# Altium PCB RC motor driver.PcbDoc
Units mil, origin at the board's own origin, x right, y up, seen from the top; angles counter-clockwise.
Board outline 2024 x 1999 mil, 2 copper layers (Top Layer, Bottom Layer); 66 components, 40 nets, 212 pads, 36 vias.
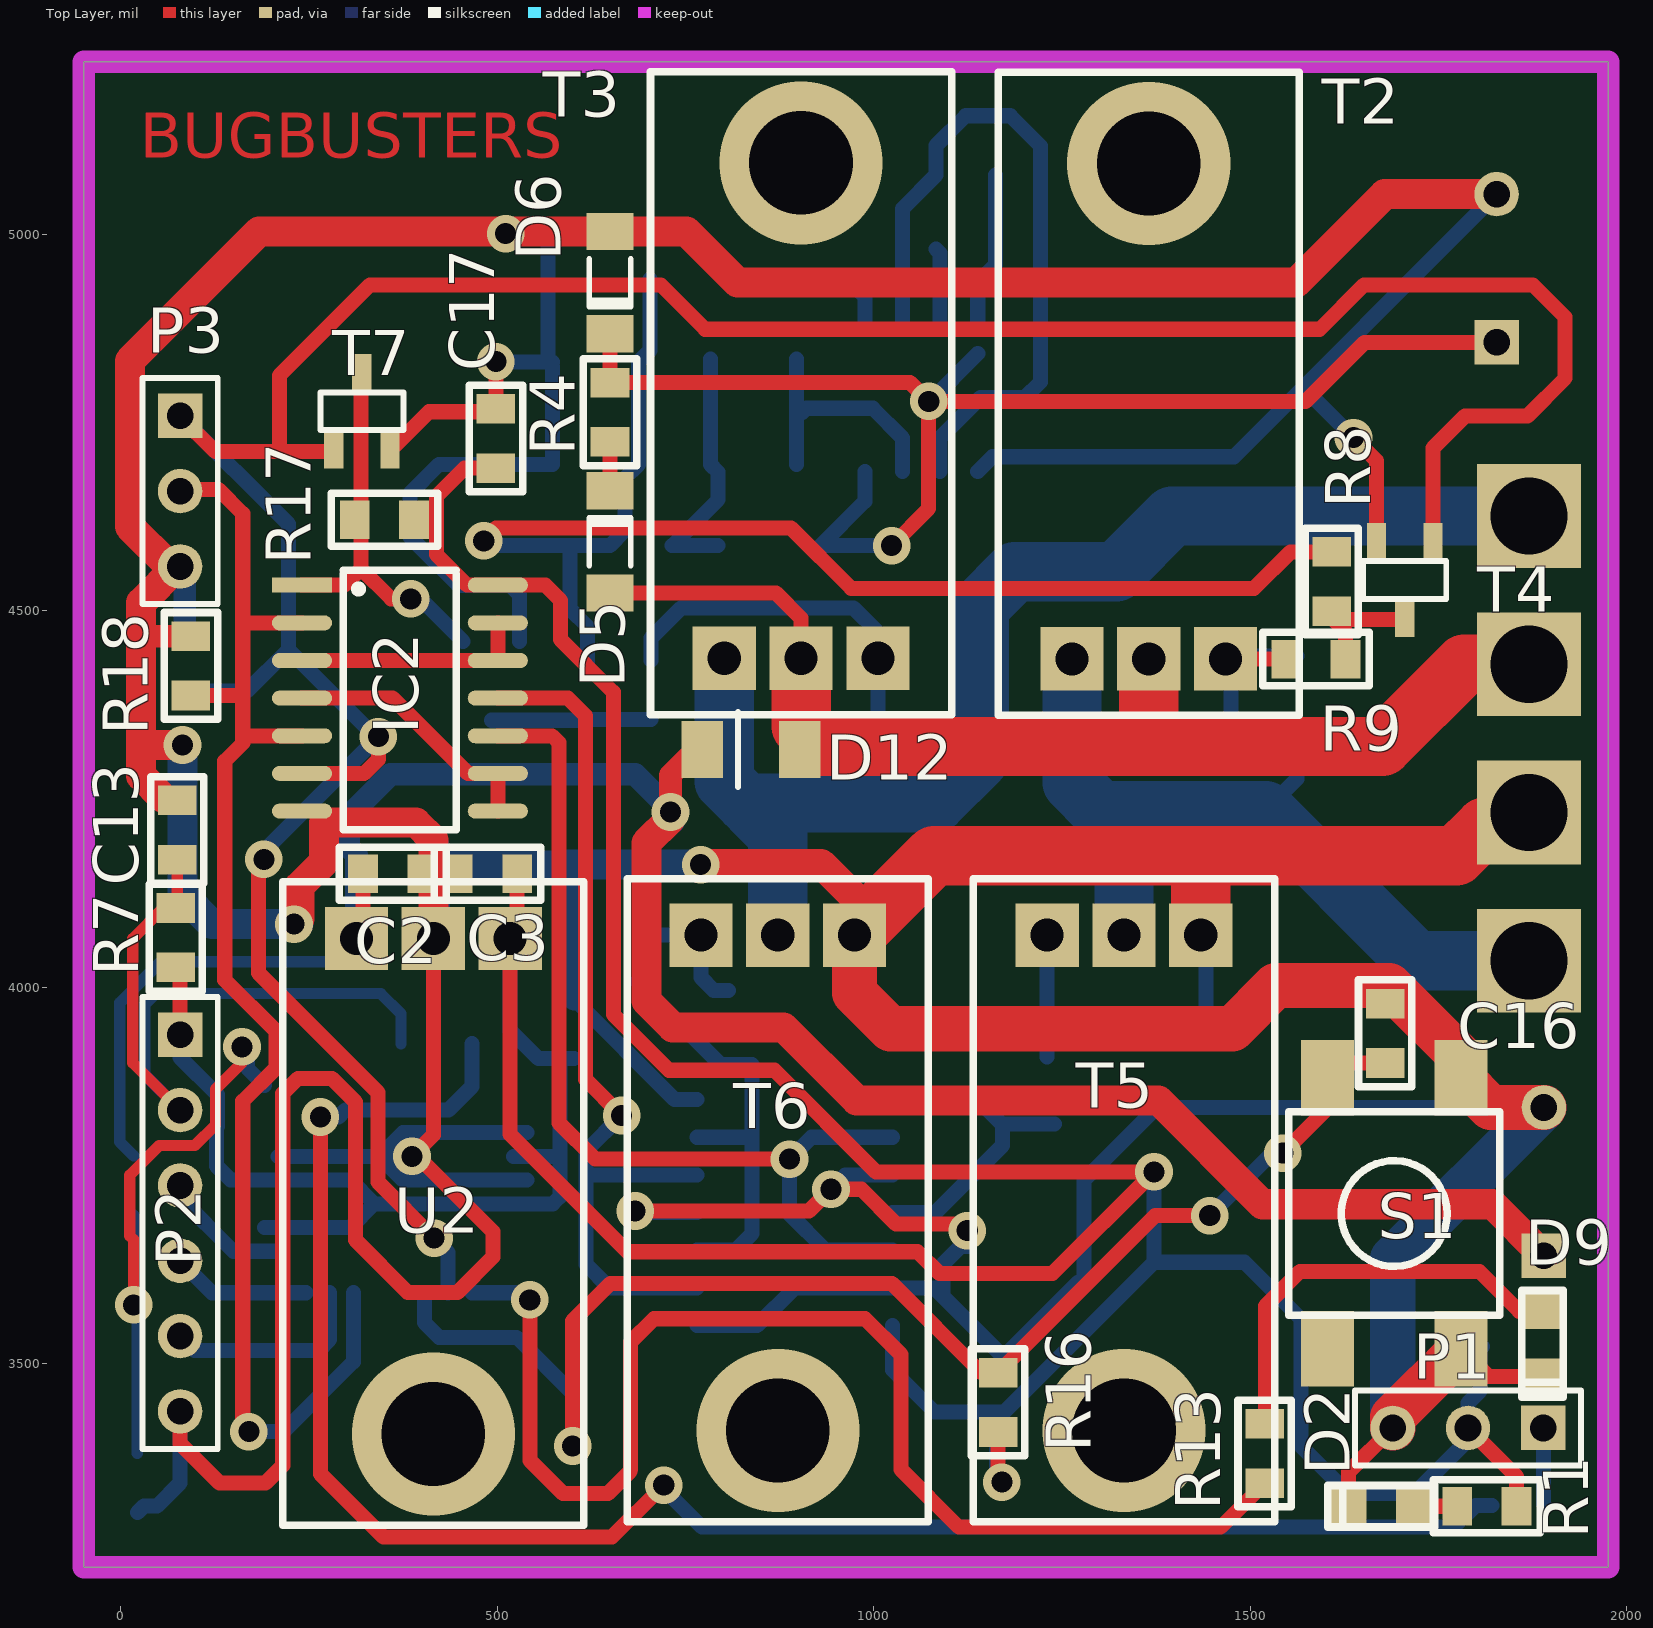
[diagram p0: Top Layer view]
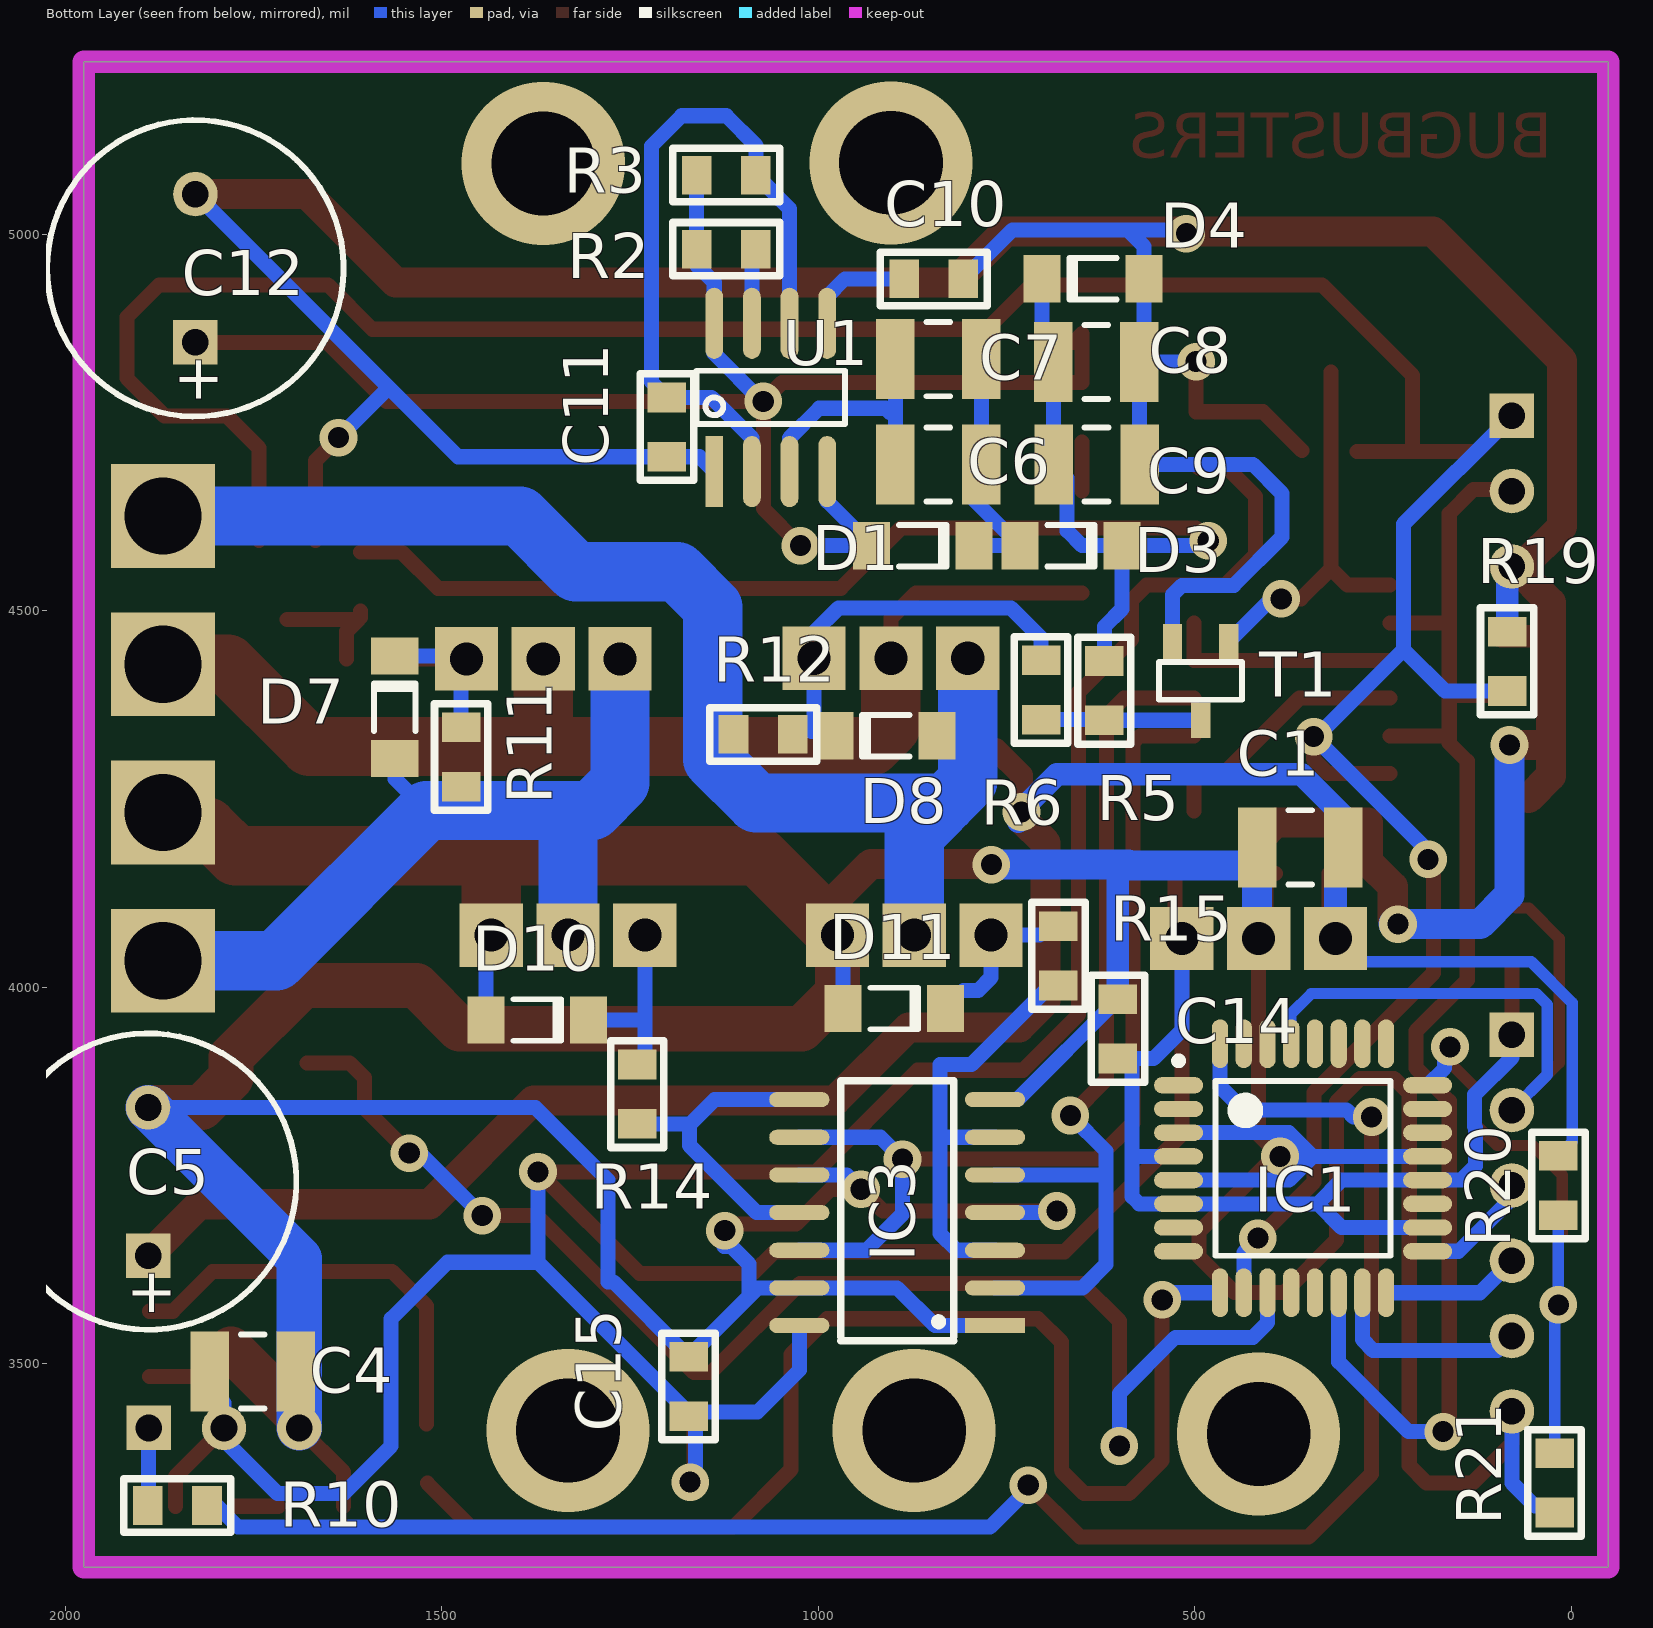
[diagram p1: Bottom Layer view, seen from below]
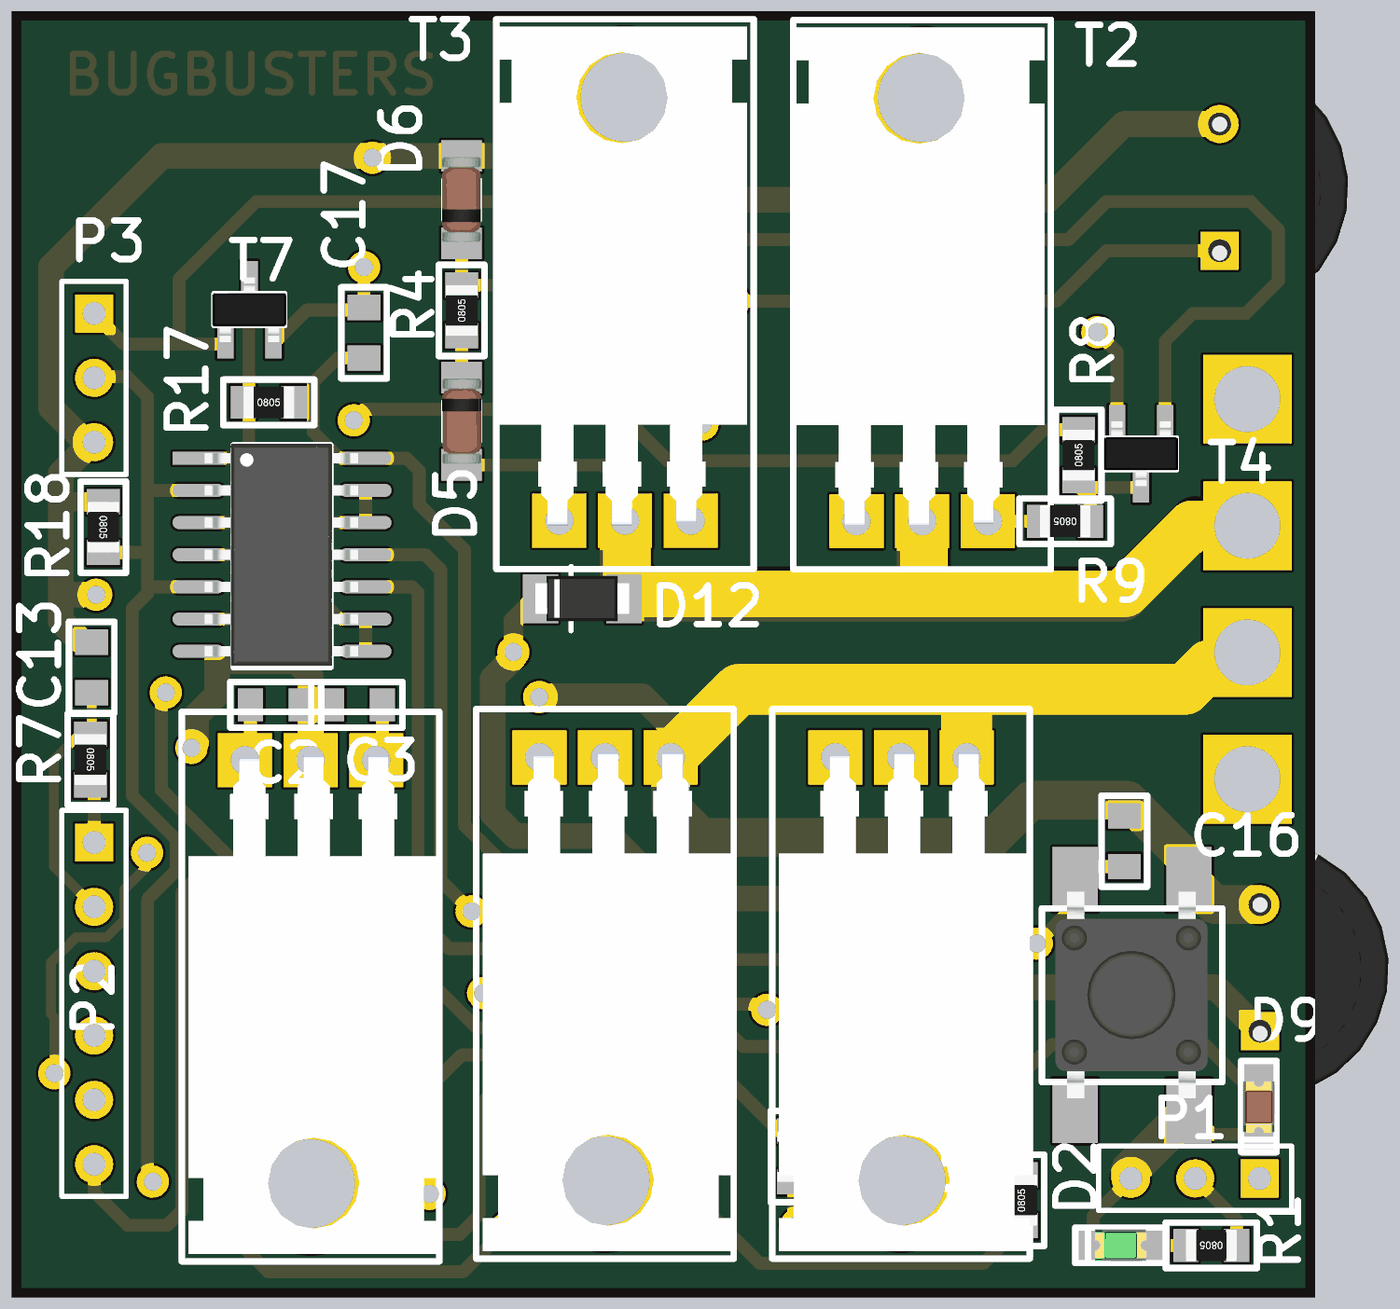
[diagram p2: 3D render of the assembled board from above, using the file's embedded part models]
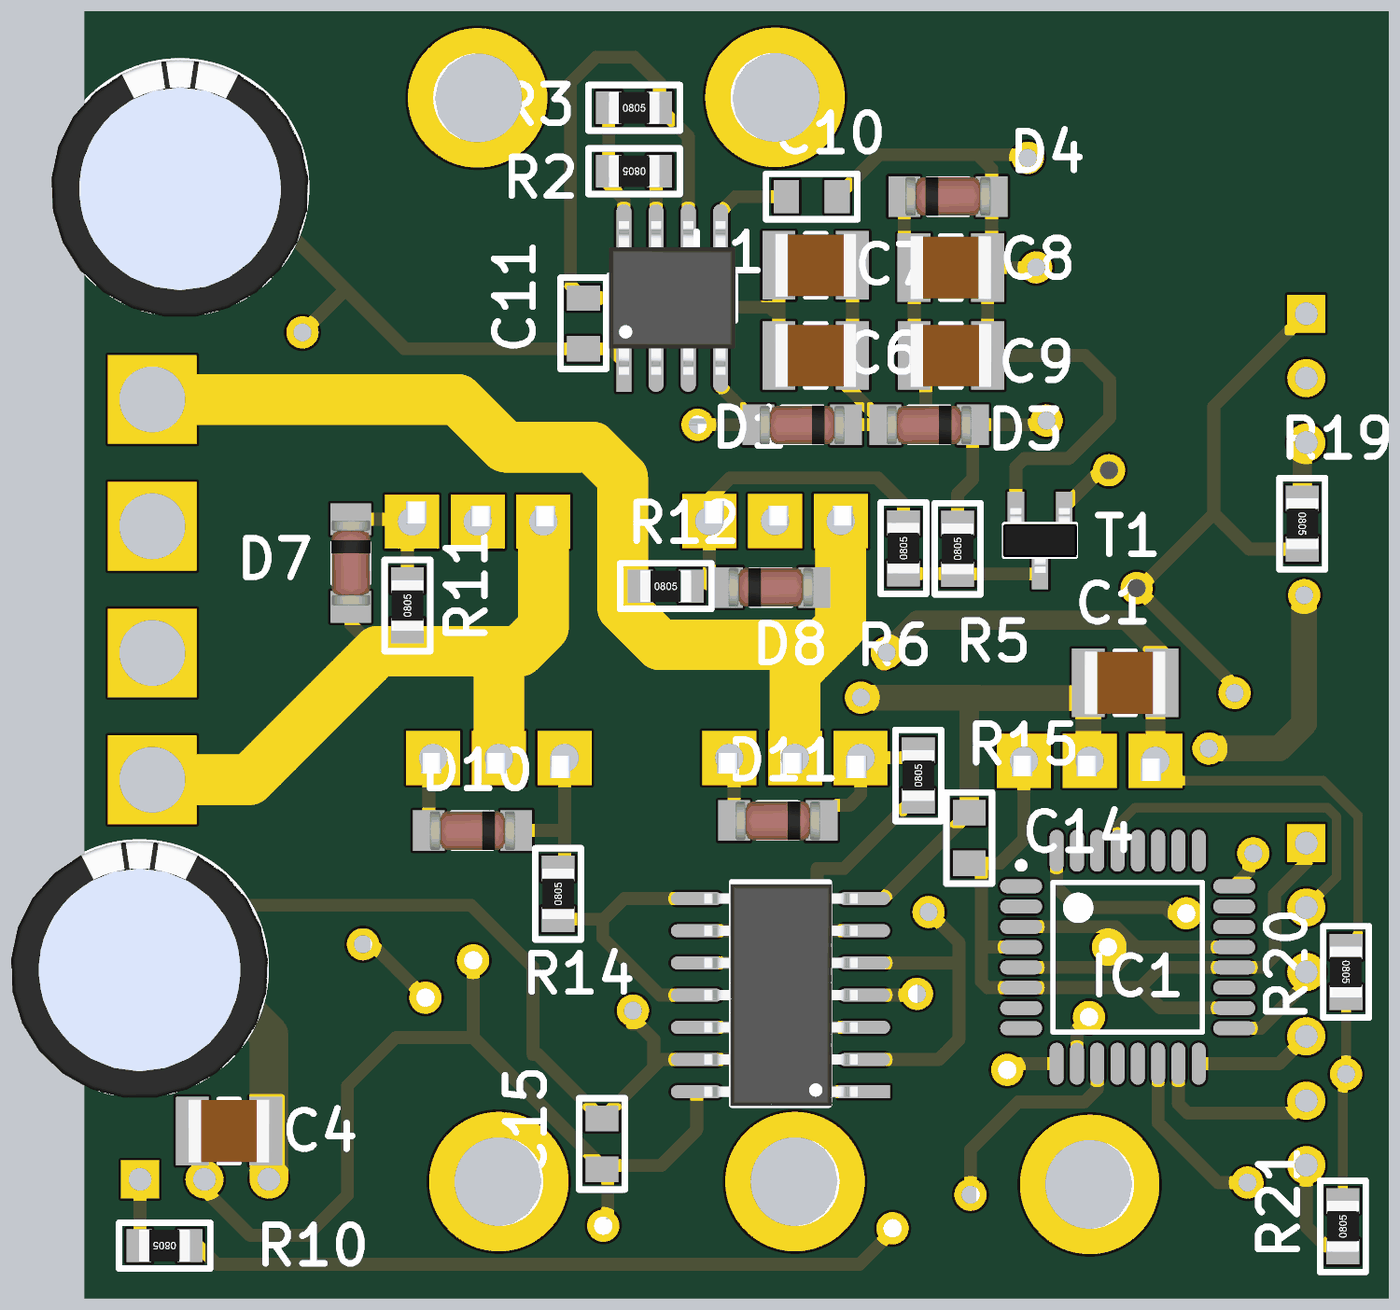
[diagram p3: 3D render of the assembled board from below, using the file's embedded part models]

## Layer stack, top to bottom
Top Layer: signal copper 1.4
Dielectric: dielectric 12.6, FR-4, Dk 4.8
Bottom Layer: signal copper 1.4

## Board outline
-49,3230 1975,3230 1975,5229 -49,5229

## Design rules (kind name [scope] priority, off if disabled: settings)
Clearance [All] p1: gap=10
PolygonConnect [All] p1: connectstyle=Relief reliefconductorwidth=10 reliefentries=4 polygonreliefangle="90 Angle"
RoutingVias [All] p1: holewidth=28 width=50 viastyle="Through Hole" minholewidth=28 minwidth=50 maxholewidth=28 maxwidth=50
SilkToSilkClearance [All] p1: silktosilkclearance=0
SilkscreenOverComponentPads [All] p1 off: minsilkscreentomaskgap=0
SolderMaskExpansion [All] p1: expansion=4
Width [All] p1: maxlimit=393.7 minlimit=10 preferedwidth=10
26 further rules are at their usual default settings.

## Components (designator, comment, footprint, x,y, rotation, side; value= is the part's Value field where it differs from the comment)
C1 "22uF" FP_1210_CAP_N 360,4186 r0 bottom
C2 "100nF" FP_0805_CAP_085 361,4151 r0 top
C3 "100nF" FP_0805_CAP_085 487,4151 r180 top
C4 "22uF" FP_1210_CAP_N 1751,3490 r180 bottom
C5 "470uF" cap_10x12 1889.76,3740.16 r180 bottom
C6 "22uF" FP_1210_CAP_N 840.28,4694.25 r180 bottom
C7 "22uF" FP_1210_CAP_N 840.28,4834.25 r180 bottom
C8 "22uF" FP_1210_CAP_N 630.51,4830.71 r180 bottom
C9 "22uF" FP_1210_CAP_N 630.28,4694.25 r180 bottom
C10 "100nF" FP_0805_CAP_085 846.46,4940.94 r180 bottom
C11 "1nF" FP_0805_CAP_085 1200.79,4744.09 r270 bottom
C12 "470uF" cap_10x12 1827,4953 r180 bottom
C13 "100nF" FP_0805_CAP_085 75,4209 r270 top
C14 "100nF" FP_0805_CAP_085 602,3945 r270 bottom
C15 "1uF" FP_0805_CAP_085 1172,3470 r90 bottom
C16 "100nF" FP_0805_CAP_085 1679,3939 r270 top
C17 "1uF" FP_0805_CAP_085 498,4729 r90 top
D1 "LLSD103A" SOD-80 866.14,4586.61 r270 bottom
D2 "LED_GREEN" FP_0805_LED_GREEN 1713,3311 r180 top
D3 "LLSD103A" SOD-80 669.29,4586.61 r270 bottom
D4 "LLSD103A" SOD-80 629.92,4940.94 r90 bottom
D5 "LLSD103A" SOD-80 649.61,4586.61 r0 top
D6 "18V" SOD-80 649.61,4940.94 r180 top
D7 "18V" SOD-80 1562,4367 r180 bottom
D8 "18V" SOD-80 905,4334 r90 bottom
D9 "LED_RED" FP_0805_LED_RED 1888,3566 r270 top
D10 "6V2" SOD-80 1377.95,3956.69 r270 bottom
D11 "6V2" SOD-80 904,3972 r270 bottom
D12 "SS26" subsma 837,4316 r90 top
IC1 "ATmega8_TQFP" TQFP32_N 356.02,3759.84 r180 bottom
IC2 "4093" Gate_SOIC14 240.65,4534.15 r270 top
IC3 "74HC125" Gate_SOIC14 765,3551 r90 bottom
P1 "Header 3" HDR1X3 1889,3415 r180 top
P2 "Header 6" HDR1X6 78.74,3937.01 r270 top
P3 "Header 3" HDR1X3 78.74,4759 r270 top
R1 "470" FP_0805_RES 1814,3311 r180 top
R2 "100R" FP_0805_RES 1122.05,4980.31 r0 bottom
R3 "6k8" FP_0805_RES 1122.05,5078.74 r180 bottom
R4 "47R" FP_0805_RES 649.61,4763.78 r90 top
R5 "10k" FP_0805_RES 620,4394 r90 bottom
R6 "10k" FP_0805_RES 704,4395 r90 bottom
R7 "10k" FP_0805_RES 73,4066 r270 top
R8 "10k" FP_0805_RES 1608,4539 r90 top
R9 "10k" FP_0805_RES 1587,4436 r180 top
R10 "1K" FP_0805_RES 1851,3312 r0 bottom
R11 "220k" FP_0805_RES 1474,4306 r90 bottom
R12 "220k" FP_0805_RES 1073,4336 r180 bottom
R13 "470" FP_0805_RES 1519,3381 r90 top
R14 "100R" FP_0805_RES 1240.16,3858.27 r90 bottom
R15 "100R" FP_0805_RES 681,4042 r90 bottom
R16 "10k" FP_0805_RES 1165,3449 r270 top
R17 "10k" FP_0805_RES 350,4621 r0 top
R18 "10k" FP_0805_RES 93,4427 r270 top
R19 "10k" FP_0805_RES 85,4433 r270 bottom
R20 "10k" FP_0805_RES 17,3737 r270 bottom
R21 "10k" FP_0805_RES 22,3342 r90 bottom
S1 "Button" "BUTTON_6X6 _SMD" 1690,3700 r90 top
T1 "PMBF170" FET_SOT23 492,4407 r90 bottom
T2 "IRL7833" "FET_TO220-3 bent legs - inverse" 1365,4436.3 r0 top
T3 "IRL7833" "FET_TO220-3 bent legs - inverse" 903.39,4437.13 r0 top
T4 "PMBF170" FET_SOT23 1705,4541 r90 top
T5 "IRL7833" "FET_TO220-3 bent legs - inverse" 1332.08,4069.36 r180 top
T6 "IRL7833" "FET_TO220-3 bent legs - inverse" 872.41,4069.36 r180 top
T7 "PMBF170" FET_SOT23 320,4765 r270 top
U1 "555" DIGITAL_SOIC8 1062.99,4783.46 r90 bottom
U2 "LM2940" "SUPPLY_TO220-3 bent legs - inverse" 415,4065 r180 top

## Footprints (in the part's own frame and the unit in brackets; to place one, negate y for a bottom-side part, rotate by r counter-clockwise, add the part's x,y. Pads: shape width x height; smd on the part's side, far side on the other; paste and mask are expansions set on the pad)
"BUTTON_6X6 _SMD" [mil]
  rect 100x70 smd: 1(-180,87.57) 1(180,87.57) 2(-180,-89.59) 2(180,-89.59)
  silkscreen extent -135,-141 135,139, body extent -160,-118 160,118, height 197
cap_10x12 [mm] "height: any, dia:10 RM5.0"
  round 1.5 hole 0.9: N(0,2.551)
  rect 1.5x1.5 hole 0.9: P(0,-2.449)
  silkscreen extent -5,-4.95 5,5.05, body extent -5.06,-5.04 5.06,5.08, height 13.2
DIGITAL_SOIC8 [mm]
  rect 2.4x0.6 smd: 1(-2.5,1.905)
  oval 2.4x0.6 smd: 2(-2.5,0.635) 3(-2.5,-0.635) 4(-2.5,-1.905) 5(2.5,-1.905) 6(2.5,-0.635) 7(2.5,0.635) 8(2.5,1.905)
  silkscreen extent -0.9,-2.5 0.9,2.5, body extent -3.03,-2.5 3.03,2.5, height 1.9
FET_SOT23 [mm] "SOT23-3 tok"
  rect 1.2x0.65 smd: D(-1.327,0) G(1.327,-0.95) S(1.327,0.95)
  silkscreen extent -0.64,-1.4 0.64,1.4, body extent -1.27,-1.46 1.27,1.46, height 0.97
"FET_TO220-3 bent legs - inverse" [mil] "TO220 fekvõ, hajlított lábakkal"
  rect 84x84 hole 44: D(0,0) G(102,0) S(-102,0)
  silkscreen extent -200,-75 200,779, body extent -200,-7 190,767, height 197
FP_0805_CAP_085 [mm] "0805 kapacitás YAGEO 0.85mm magas"
  rect 1x1.3 smd: 1(-1,0) 2(1,0)
  silkscreen extent -1.8,-0.9 1.8,0.9, body extent -1,-0.64 1.03,0.64, height 0.85
FP_0805_LED_GREEN [mm] "0805 méretû zöld LED"
  rect 1.2x1.3 smd: A(-0.1,0) K(2.1,0)
  silkscreen extent -0.8,-0.7 2.8,0.7, body extent 0.01,-0.63 2.03,0.62, height 1.1
FP_0805_LED_RED [mm] "0805 méretû piros LED"
  rect 1.2x1.3 smd: A(-0.1,0) K(2.1,0)
  silkscreen extent -0.8,-0.7 2.8,0.7, body extent 0.01,-0.63 2.03,0.62, height 1.1
FP_0805_RES [mm] "0805 ellenállás"
  rect 1x1.3 smd: 1(-1,0) 2(1,0)
  silkscreen extent -1.8,-0.9 1.8,0.9, body extent -1,-0.62 1,0.63, height 0.62
FP_1210_CAP_N [mm] "Chip Capacitor, Body 3.2x2.5mm, IPC Medium Density"
  rect 1.3x2.7 smd: 1(-1.45,0) 2(1.45,0)
  silkscreen extent -0.4,-1.25 0.4,1.25, body extent -1.6,-1.25 1.6,1.25, height 2.5
Gate_SOIC14 [mil] "SOIC-14 egyesek szerint narrow, RET szerint normál"
  rect 20x80 smd: 1(0,0)
  oval 20x80 smd: 2(50,0) 3(100,0) 4(150,0) 5(200,0) 6(250,0) 7(300,0) 8(300,260) 9(250,260) 10(200,260) 11(150,260) 12(100,260) 13(50,260) 14(0,260)
  silkscreen extent -20,55 325,205, body extent -22,10 322,248, height 63
HDR1X3 [mm] "Connector; Header; 3 Position"
  rect 1.5x1.5 hole 0.9: 1(0,0)
  round 1.5 hole 0.9: 2(2.54,0) 3(5.08,0)
  silkscreen extent -1.27,-1.27 6.35,1.27
HDR1X6 [mm] "Connector; Header; 6 Position"
  rect 1.5x1.5 hole 0.9: 1(0,0)
  round 1.5 hole 0.9: 2(2.54,0) 3(5.08,0) 4(7.62,0) 5(10.16,0) 6(12.7,0)
  silkscreen extent -1.27,-1.27 13.97,1.27
SOD-80 [mm]
  rect 1.6x1.25 smd: A(0,-1.598) K(0,1.852)
  silkscreen extent -0.7,-0.67 0.7,0.93, body extent -0.76,-1.55 0.78,1.8
subsma [mil] "nagyfesz egyeniranyito"
  rect 76x55 smd: A(0,-64.75) K(0,64.75)
  silkscreen extent -50,17 50,17, body extent -35,-73 35,73, height 53
"SUPPLY_TO220-3 bent legs - inverse" [mil] "TO220 fekvõ, hajlított lábakkal"
  rect 84x84 hole 44: 1(102,0) 2(0,0) 3(-102,0)
  silkscreen extent -200,-75 200,779, body extent -200,-7 190,767, height 197
TQFP32_N [mm] "Thin QFP, 32-Leads, Body 7x7mm, Pitch 0.8mm, IPC Medium Density"
  oval 1.65x0.55 smd: 1(-4.2,2.8) 2(-4.2,2) 3(-4.2,1.2) 4(-4.2,0.4) 5(-4.2,-0.4) 6(-4.2,-1.2) 7(-4.2,-2) 8(-4.2,-2.8) 17(4.2,-2.8) 18(4.2,-2) 19(4.2,-1.2) 20(4.2,-0.4) 21(4.2,0.4) 22(4.2,1.2) 23(4.2,2) 24(4.2,2.8)
  oval 0.55x1.65 smd: 9(-2.8,-4.2) 10(-2,-4.2) 11(-1.2,-4.2) 12(-0.4,-4.2) 13(0.4,-4.2) 14(1.2,-4.2) 15(2,-4.2) 16(2.8,-4.2) 25(2.8,4.2) 26(2,4.2) 27(1.2,4.2) 28(0.4,4.2) 29(-0.4,4.2) 30(-1.2,4.2) 31(-2,4.2) 32(-2.8,4.2)
  silkscreen extent -4.33,-2.95 2.95,3.75, body extent -3.5,-3.5 3.5,3.5, height 1.2

## Part data
C1 C2 C3 C4 C6 C7 C8 C9 C10 C11 C13 C14 C15 C16 C17: library part CAP, "Capacitor"
C5 C12: library part CAP_ELECT, "Polarized Capacitor"
D1 D3 D4 D5 D12: library part DIODE_big
D2: library part LED_G, "Typical LED"
D6 D7 D8 D10 D11: library part ZENER, "Zener Diode"
D9: library part LED_R, "Typical LED"
IC2: "Quad 2-Input NAND Schmitt Trigger"
P1 P3: "Header, 3-Pin"
P2: "Header, 6-Pin"
R1 R2 R3 R4 R5 R6 R7 R8 R9 R10 R11 R12 R13 R14 R15 R16 R17 R18 R19 R20 R21: library part RES, "Resistor"
S1: library part SW-PB, "Switch"
T1 T2 T3 T4 T5 T6 T7: library part NMOS
U1: "555 Counter"
U2: library part 78xx

## Free pads (board coordinates)
  rect 137.8x137.8 hole 102.36: 0(1870.08,4035.43) 0(1870.08,4232.28) 0(1870.08,4429.13) 0(1870.08,4625.98)

## Via types
v1: diameter 50, hole 28, Top Layer to Bottom Layer, 31 vias
v2: diameter 216.54, hole 137.8, Top Layer to Bottom Layer, 5 vias

## Nets (pads, with @x,y where several pads share a name; then routed paths per layer and width w, separated by ;. In a path a pad name is that pad's centre, name@x,y a point inside that pad or via, vN(x,y) a via of type N, cw(c..) or ccw(c..) an arc to the next point about the centre after c; other vN are vias at no path point)
2X_VCC: C8.1 C9.1 D3.K D4.K R5.2 R8.2 | length 1892.8
  Top Layer w20: v1(482,4593) 481,4593 498,4610 890,4610 970,4530 1505,4530 1553.37,4578.37 R8.2
  Bottom Layer w20: v1@481,4593 v1(482,4593) ; v1@485.39,4586.61 D3.K ; R5.2 620,4479 596.38,4502.62 D3.K ; D4.K 702.83,4845.94 C8.1 687.36,4830.47 C9.1 669.29,4676.18 669.29,4606.3 649.61,4586.61 D3.K
5V: C3.1 C4.1 C14.2 C15.1 C17.1 IC1.4 IC1.6 IC1.18 IC1.20 IC2.14 IC3.14 P1.2 P2.1 R1.1 R7.2 R16.2 R17.2 U2.3 | length 6192.4
  Top Layer w20: P2.1 R7.2@78.74,4026.63 ; C17.1@498,4693.57 494.06,4689.63 456.63,4689.63 419,4652 419,4575 459.85,4534.15 IC2.14 563.85,4534.15 584,4514 584,4462 654,4392 654,3964 728,3890 868,3890 1003,3755 v1(1372,3755) 1237,3620 1087,3620 1058,3649 673,3649 517,3805 U2.3 526.37,4074.37 C3.1 ; R16.2 1165,3348 v1(1170,3343) ; P1.2 1853.37,3350.63 R1.1
  Bottom Layer w20: P2.1 78.74,3907.05 128.27,3857.52 128.27,3815.23 127,3813.96 127,3763 145.91,3744.09 IC1.20 305.1,3744.09 336.6,3712.6 ; IC1.18 305.1,3681.1 336.6,3712.6 ; U2.3 517,3943 554.37,3905.63 C14.2@583,3905.63 ; IC1.4 580,3775.59 ; C14.2 C14.2@583,3905.63 ; IC3.14 1025,3491.73 1080.31,3436.42 1173.42,3436.42 1372,3635 ; C15.1@1163,3423.57 1163,3350 v1(1170,3343) ; v1(1372,3755) 1372,3635 ; C4.1@1808.09,3523 1805,3519.91 1805,3464 1789,3448 P1.2 1789,3399 1718,3328 1630,3328 1567,3391 1567,3560 1492,3635 1372,3635 ; 336.6,3712.6 IC1.6 573.6,3712.6 583,3722 C14.2@583,3905.63
BUTTON: C16.2 IC1.11 R16.1 S1.1 | length 1854.3
  Top Layer w20: v1(600,3391) 600,3557 650,3607 1024,3607 1142.63,3488.37 R16.1 1373.63,3697 v1(1446,3697) ; v1(1543,3780) 1602.43,3839.43 1602.43,3880 1622.06,3899.63 C16.2
  Bottom Layer w20: IC1.11 403.26,3554.74 422.65,3535.35 525.65,3535.35 600,3461 v1(600,3391) ; v1(1446,3697) 1529,3780 v1(1543,3780)
DIR: IC1.10 IC2.6 P3.1 R19.2 T4.G T7.G | length 4309.3
  Top Layer w20: P3.1@78,4759 125.5,4711.5 210.86,4711.5 ; v1@183,4170 183,4019 341.59,3860.41 341.59,3741.41 v1(416,3667) ; IC2.6 323.15,4284.15 342,4303 v1(342,4333) ; T7.G@284.34,4711.5 210.86,4711.5 ; T4.G 1742.4,4716.4 1785,4759 1868,4759 1918,4809 1918,4890 1875,4933 1651,4933 1592,4874 776,4874 717,4933 331,4933 210.86,4812.86 210.86,4711.5
  Bottom Layer w20: P3.1 222.5,4615.24 222.5,4448.5 ; R19.2 167.63,4393.63 222.5,4448.5 ; v1@181,4172 v1(342,4333) ; v1@338,4333 222.5,4448.5 ; v1(416,3667) 434.76,3648.24 IC1.10
  other v1: 190,4170
DIR_INV: IC2.1 R17.1 T1.G T7.D | length 524.3
  Top Layer w20: IC2.1 297.15,4534.15 319,4556 ; T7.D@319,4817.24 319,4556 ; v1(385,4516) 359,4516 319,4556
  Bottom Layer w20: v1(385,4516) 397.84,4516 T1.G
GND: C1.2 C2.2 C3.2 C4.2 C5.N C8.2 C9.2 C10.2 C11.2 C12.N C13.1 C14.1 C15.2 C16.1 C17.2 D2.K D4.A D6.A D9.K D10.A D11.A IC1.3 IC1.5 IC1.21 IC2.7 IC3.1 IC3.4 IC3.7 IC3.10 IC3.13 P1.3 P2.6 P3.3 pad.0@1870.08,4232.28 R18.1 R19.1 R21.1 S1.2 T1.S T4.S T5.S T6.S T7.S U1.1 U2.2 | length 15359.1
  Top Layer w20: 27,4320 29,4322 ; P2.6 78.74,3394.26 131,3342 192,3342 215,3365 215,3859 235,3879 280.57,3879 311.59,3847.98 311.59,3664.41 381,3595 447,3595 494,3642 494,3676 394.41,3775.59 v1(386.59,3775.59) 415,3804 U2.2 ; v1@236,4084 v1@240.65,4088.65 ; T7.S 409.08,4764.43 498,4764.43 C17.2 v1(498,4831) ; C2.2@392.43,4151 C2.2 415,4151 C3.2@435.57,4151 ; v1(683,3703) 914,3703 v1(943,3732) 983.57,3732 1029.57,3686 v1@1124,3686 ; D2.K 1630.32,3356.32 P1.3 ; v1(1637,4730) 1667.6,4699.4 T4.S ; S1.2@1779.59,3520 1816.27,3483.32 D9.K
  Top Layer w30: 36.63,4466.37 R18.1 ; P3.3@65,4559 75,4559 P3.3
  Top Layer w40: 29,4322 v1(82,4322) ; C13.1@56.63,4251.37 27,4281 27,4320 27,4511 P3.3@75,4559 ; P3.3@65,4559 12,4612 12,4832 183.86,5003.86 D6.A 751.14,5003.86 819,4936 1561,4936 1678.43,5053.43 C12.N ; v1(230,4084) 237,4091 237,4134 270,4167 270,4219 392,4219 415,4196 415,4151 U2.2 ; v1@770,4164 930,4164 974.41,4119.59 T6.S
  Top Layer w60: T6.S 974.41,3992.59 1022,3945 1476,3945 1533.59,4002.59 1684.41,4002.59 1779.59,3907.41 1779.59,3880 1819.01,3840.58 C5.N ; P1.3 1689,3429.41 S1.2@1779.59,3520 ; 1713,4175 1721.37,4166.63
  Top Layer w78.74: T6.S 1080.05,4175 1425,4175 ; T5.S 1434.08,4165.92 1425,4175 ; pad.0@1870.08,4232.28 1850.39,4212.6 1811.02,4212.6 1773.43,4175 1713,4175 1425,4175
  Bottom Layer w20: R21.1 30.63,3311.26 48.26,3311.26 78.74,3341.74 P2.6 ; IC1.21@208.66,3775.59 343.41,3775.59 ; v1(386.59,3775.59) 343.41,3775.59 ; v1(498,4831) 498.29,4830.71 C8.2@567.01,4830.71 ; v1(511,5001) 516,5006 589,5006 ; T1.S 529.4,4521.4 516.8,4534 448,4534 384,4598 384,4656 422.25,4694.25 C9.2 C8.2@573.19,4824.53 ; IC1.5@539.37,3744.09 IC1.5 374.91,3744.09 343.41,3775.59 ; IC1.3@539.37,3807.09 IC1.3 374.91,3807.09 343.41,3775.59 ; C8.2 C8.2@567.01,4830.71 ; C14.1 735.37,3851 IC3.7 ; v1(683,3703) 685,3701 IC3.4 ; IC3.1 845,3551 895,3601 IC3.13 1080.37,3601 1091.69,3589.68 ; C10.2 742.03,5006 589,5006 ; v1(943,3732) 962,3751 IC3.10 ; D11.A T6.S@966.91,4061.86 ; v1(1124,3677) 1124,3657 1125,3656 1115,3656 1091.69,3632.69 1091.69,3589.68 ; U1.1 1157.68,4704.72 C11.2 1478.3,4704.72 C12.N ; D10.A T5.S@1440.87,4062.58 ; 1577.5,4789.5 v1(1637,4730) ; C5.N 1375.58,3840.58 1279,3744 1279,3609 1271.63,3609 C15.2 1091.69,3589.68 ; C8.2@567.01,4830.71 D4.A 567.01,4984.01 589,5006
  Bottom Layer w30: R19.1 P3.3@85,4552.74 ; U2.2 U2.2@417.09,4067.09 ; C1.2 C1.2@441.09,4162 ; 588,4163 589,4162 602,4149 ; C14.1 602,4149 ; 602,4162 602,4149 ; pad.0@1870.08,4232.28 pad.0@1922.28,4232.28
  Bottom Layer w40: v1(82,4322) 82,4123 121,4084 v1(230,4084) v1@236,4084 ; U2.2@417.09,4067.09 C1.2 ; C1.2@441.09,4162 589,4162 602,4162 ; 588,4163 v1(770,4163)
  Bottom Layer w60: P1.3 1689,3639.82 C5.N
KIMENET1: D7.A pad.0@1870.08,4035.43 R11.1 T2.S T5.D | length 1089.4
  Bottom Layer w20: 1520,4235 1562,4277 D7.A
  Bottom Layer w78.74: T2.S 1263,4272 1300,4235 1520,4235 1719.57,4035.43 pad.0@1870.08,4035.43 ; T5.D 1332.08,4202.92
KIMENET2: D8.A pad.0@1870.08,4625.98 R12.1 T3.S T6.D | length 1713.4
  Bottom Layer w78.74: T3.S 801.39,4273.61 872.41,4202.59 T6.D ; 830,4245 1082,4245 1140,4303 1140,4505 1187,4552 1322,4552 1395.98,4625.98 pad.0@1870.08,4625.98
LED: IC1.9 R13.1 | length 1712.3
  Top Layer w20: v1(543,3585) 543.27,3584.73 543.27,3371.73 587,3328 647,3328 676,3357 676,3358.64 677,3359.64 677,3529 708,3560 988.41,3560 1036,3512.41 1036,3360 1112.83,3283.17 1460.54,3283.17 R13.1
  Bottom Layer w20: IC1.9 533.51,3594.49 v1(543,3585)
LEFT: IC3.8 IC3.11 R14.1 | length 440.8
  Bottom Layer w20: IC3.11 1082,3701 1171,3790 1171,3817.42 1169.52,3818.9 ; IC3.8 1137.42,3851 1169.52,3818.9 ; R14.1 1169.52,3818.9
MISO: IC1.16 P2.4 | length 184.7
  Bottom Layer w20: P2.4 121.26,3594.49 IC1.16
MOSI: IC1.15 P2.5 | length 274.5
  Bottom Layer w20: P2.5 97.75,3518 263,3518 277.28,3532.28 IC1.15
NetC6_1: C6.1 C7.1 U1.3 | length 335.7
  Bottom Layer w20: C6.1 C7.1 ; 905.51,4763.78 910.83,4769.09 998.62,4769.09 1037.99,4729.72 U1.3
NetC6_2: C6.2 C7.2 D1.K D3.A | length 338.1
  Bottom Layer w20: C7.2 C6.2 793.23,4684.21 793.23,4647.64 D3.A D1.K
NetC10_1: C10.1 U1.5 | length 147.5
  Bottom Layer w20: C10.1 964.57,4940.94 987.99,4917.52 U1.5
NetC11_1: C11.1 R3.2 U1.2 U1.6 | length 948.1
  Bottom Layer w20: U1.6 1037.99,5034.06 R3.2 1082.68,5118.11 1122.05,5157.48 1181.1,5157.48 1221,5117.58 1221,4803.68 C11.1 1141.73,4783.46 1087.99,4729.72 U1.2
NetC12_P: C12.P D1.A D6.K R2.2 R3.1 R4.2 U1.4 U1.8 | length 2028.7
  Top Layer w20: D6.K@661.06,4856.57 D6.K R4.2 1047.89,4803.15 v1(1072.83,4778.21) ; v1(1023.62,4586.61) 1072.83,4635.83 v1(1072.83,4778.21) ; C12.P 1651.57,4856.57 1573.21,4778.21 v1(1072.83,4778.21)
  Bottom Layer w20: U1.4 987.99,4645.55 D1.A v1(1023.62,4586.61) ; v1(1072.83,4778.21) 1074.36,4778.21 U1.8@1137.99,4841.84 ; U1.8 1137.99,4935.99 1161.42,4959.42 R2.2 R3.1
NetD2_A: D2.A R1.2 | length 57.7
  Top Layer w20: D2.A R1.2
NetD5_K: D5.K R4.1 | length 64.9
  Top Layer w20: D5.K R4.1
NetD7_K: D7.K R9.2 R11.2 T2.G | length 256.1
  Top Layer w20: T2.G 1467.3,4436 R9.2
  Bottom Layer w20: T2.G@1470.61,4439.91 D7.K ; R11.2 T2.G@1474,4429.3
NetD8_K: D8.K R6.2 R12.2 T3.G | length 494.1
  Bottom Layer w20: R6.2 704,4464 744,4504 973,4504 1005.39,4471.61 T3.G 1005.39,4343.61 1009,4340
NetD9_A: D9.A R13.2 | length 565.7
  Top Layer w20: R13.2@1520,3420.37 1520,3577 1566,3623 1804,3623 1857.06,3569.94 D9.A
NetD10_K: D10.K R14.2 T5.G | length 230.3
  Bottom Layer w20: R14.2@1230.08,3907.71 T5.G ; 1236.39,3956.69 D10.K
NetD11_K: D11.K R15.2 T6.G | length 164.4
  Bottom Layer w20: R15.2@705.99,4069.36 T6.G 770.41,4013.05 787.4,3996.06 D11.K@807.02,3996.06
NetIC1_24: IC1.24 R20.2 R21.2 | length 813.5
  Top Layer w15: v1(17,3578.37) 17,3665 12,3670 12,3751 50.98,3789.98 98.22,3789.98 125.77,3817.53 125.77,3864.77 161,3900 v1(161,3921)
  Bottom Layer w15: 16,3666 17,3665 ; v1(17,3578.37) 17,3665 ; R20.2 17,3665 ; R21.2 v1@22,3573.37
  Bottom Layer w20: v1(161,3921) 167,3921 168,3920 168,3892.74 IC1.24
NetIC1_32: IC1.32 R10.1 | length 2405.9
  Top Layer w20: v1(265,3828) 265,3354 349,3270 652,3270 v1(721,3339)
  Bottom Layer w20: v1(265,3828) 289,3828 298.09,3837.09 435.09,3837.09 466.25,3868.25 IC1.32 ; v1(721,3339) 721,3334 771.83,3283.17 1770.17,3283.17 1799,3312 R10.1 R10.1@1820.63,3312
NetIC2_3: IC2.3 IC2.12 IC2.13 | length 310
  Top Layer w20: IC2.3 IC2.12 IC2.13
NetIC2_4: IC2.4 IC2.8 IC2.9 | length 351.4
  Top Layer w20: IC2.4 360.85,4384.15 460.85,4284.15 IC2.9 IC2.8
NetIC2_10: IC2.10 IC3.9 IC3.12 | length 1294.9
  Top Layer w20: IC2.10 572.85,4334.15 582,4325 582,3820 630,3772 v1(888,3772)
  Bottom Layer w20: IC3.12 936,3651 888,3699 v1(888,3772) 917,3801 IC3.9
NetIC2_11: IC2.11 IC3.2 IC3.5 | length 1198
  Top Layer w20: IC2.11 593.56,4384.15 617,4360.71 617,3878 v1(665,3830)
  Bottom Layer w20: 621,3751 IC3.5 ; v1(665,3830) 618,3783 618,3632 649,3601 IC3.2
NetR2_1: R2.1 U1.7 | length 100.6
  Bottom Layer w20: R2.1 1087.99,4975 U1.7
NetR5_1: R5.1 R6.1 T1.D | length 211.1
  Bottom Layer w20: T1.D 619.87,4354.76 R5.1 ; R5.1@621,4355.63 R6.1
NetR8_1: R8.1 R9.1 T4.D | length 166
  Top Layer w20: R8.1 1608,4491 R8.1@1610.24,4488.76 ; R9.1 1626.37,4472.63 R8.1@1610.24,4488.76 ; T4.D R8.1@1610.24,4488.76
PWM: IC1.14 IC2.2 IC2.5 P3.2 R18.2 | length 1858.2
  Top Layer w20: P3.2@73.82,4661.02 129.98,4661.02 161.91,4629.09 161.91,4324.31 138,4300.4 138,4010 206,3942 206,3893 161.91,3848.91 v1@161.91,3410 ; R18.2 156.28,4387.63 ; 163,4334.15 IC2.5 ; 169,4484.15 IC2.2
  Bottom Layer w20: v1(170,3410) 216,3410 308.77,3502.77 IC1.14
RESET: C13.2 IC1.29 P2.2 R7.1 | length 947.1
  Top Layer w15: R7.1 56.37,4105.37 16,4065 16,3899.75 P2.2 ; R7.1@75,4107.37 C13.2
  Bottom Layer w15: P2.2 31.71,3884.04 31.71,3977.32 46.39,3992 345,3992 372,3965 IC1.29@372,3925.2
RIGHT: IC3.3 IC3.6 R15.1 | length 578.4
  Bottom Layer w20: R15.1@686.19,4007.82 796.36,3897.64 838,3897.64 838,3804 ; IC3.3 816,3651 838,3673 838,3804 ; IC3.6 835,3801 838,3804
SCK: IC1.17 P2.3 | length 175.9
  Bottom Layer w20: P2.3 78.74,3720.26 149.39,3649.61 IC1.17@208.66,3649.61
SERVO_IN: P1.1 R10.2 | length 103.6
  Bottom Layer w20: P1.1 1889,3313.37 R10.2
VCC: D5.A D12.A pad.0@1870.08,4429.13 T2.D T3.D | length 1550.5
  Top Layer w20: D5.A 870,4523.7 903.39,4490.31 T3.D
  Top Layer w78.74: T3.D 903.39,4346.61 930,4320 1365,4320 ; T2.D 1365,4320 ; pad.0@1870.08,4429.13 1784.13,4429.13 1675,4320 1365,4320
VCC_PROT: C1.1 C2.1 C5.P D12.K R20.1 U2.1 | length 3020.8
  Top Layer w20: U2.1@321.57,4073.57 C2.1
  Top Layer w30: v1@722.5,4231.5 730,4224 v1(730,4233) 730,4281.91 D12.K@764.09,4316
  Top Layer w40: v1@730,4224 698,4192 698,3982 733,3947 880,3947 977,3850 1378,3850 1516,3712 1821.5,3712 C5.P
  Bottom Layer w15: R20.1 -1.5,3794.87 -1.5,3979.46 53.04,4034 282,4034 U2.1
  Bottom Layer w30: U2.1@303,4065 U2.1 313,4175.91 C1.1 302.91,4227.91 358,4283 683,4283 734,4232 734,4220 730,4224 v1(730,4233)
pads on no net: IC1.1 IC1.2 IC1.7 IC1.8 IC1.12 IC1.13 IC1.19 IC1.22 IC1.23 IC1.25 IC1.26 IC1.27 IC1.28 IC1.30 IC1.31
copper on no net:
  other v2: 415,3407.08 872.41,3411.44 1332.08,3411.44 1365,5094.22 903.39,5095.05

## Keep-outs
Keep-Out Layer:
  the board outline again, w30

## Other copper
Top Layer:
  text "BUGBUSTERS" at 25,5102 h60

## Silkscreen, mask and mechanical layers (free items; w line width, h text height)
Top Solder:
  lines w30: -49,3230 -49,5229 1975,5229 1975,3230 -49,3230
  lines w78.74: 908.39,4443.83 908.39,4353.31 935,4326.7 1370,4326.7 ; 974.41,4069.36 1080.05,4175 1425,4175 1713,4175 1773.43,4175 1811.02,4212.6 ; 1370,4443 1370,4326.7 ; 1434.08,4069.36 1434.08,4165.92 ; 1789.13,4435.83 1680,4326.7 1370,4326.7
Bottom Solder:
  lines w78.74: 801.39,4437.13 801.39,4273.61 872.41,4202.59 872.41,4069.36 ; 830,4245 1082,4245 1140,4303 1140,4505 1187,4552 1322,4552 1395.98,4625.98 1870.08,4625.98 ; 1263,4436.3 1263,4272 1300,4235 1520,4235 1719.57,4035.43 1870.08,4035.43 ; 1332.08,4069.36 1332.08,4202.92

## Text inside footprints (layer, text, board x,y; h text height)
C5: Bottom Overlay "+" at 1859.76,3560.16 h59.06 r270
C12: Bottom Overlay "+" at 1797,4773 h59.06 r270